# Altium PCB AS_Encoder.PcbDoc
Units mm, origin at the board's own origin, x right, y up, seen from the top; angles counter-clockwise.
Board outline 36 x 36 mm, 2 copper layers (Top Layer, Bottom Layer); 8 components, 10 nets, 42 pads, 29 vias.
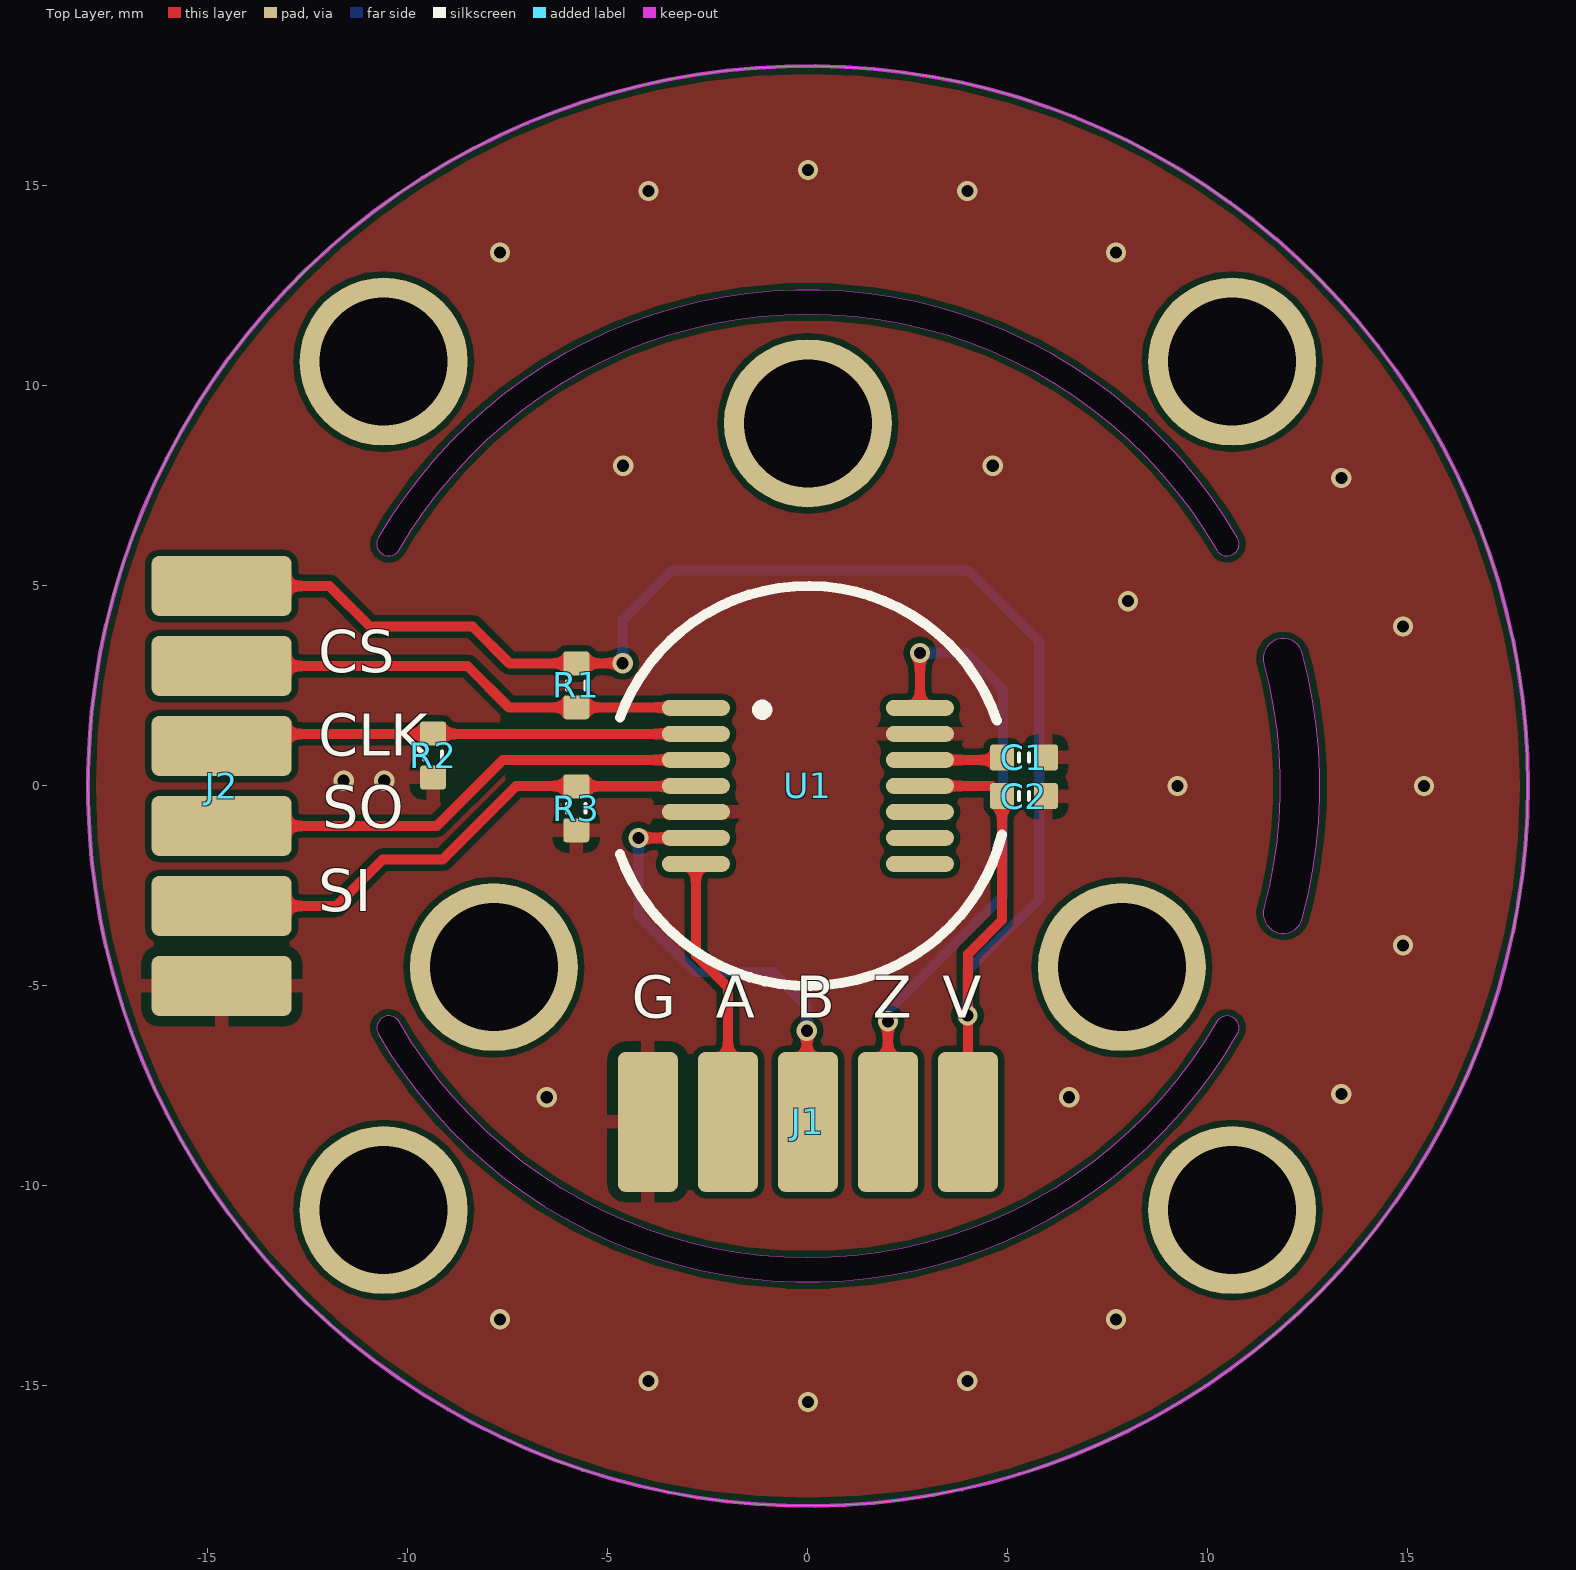
[diagram p0: Top Layer view]
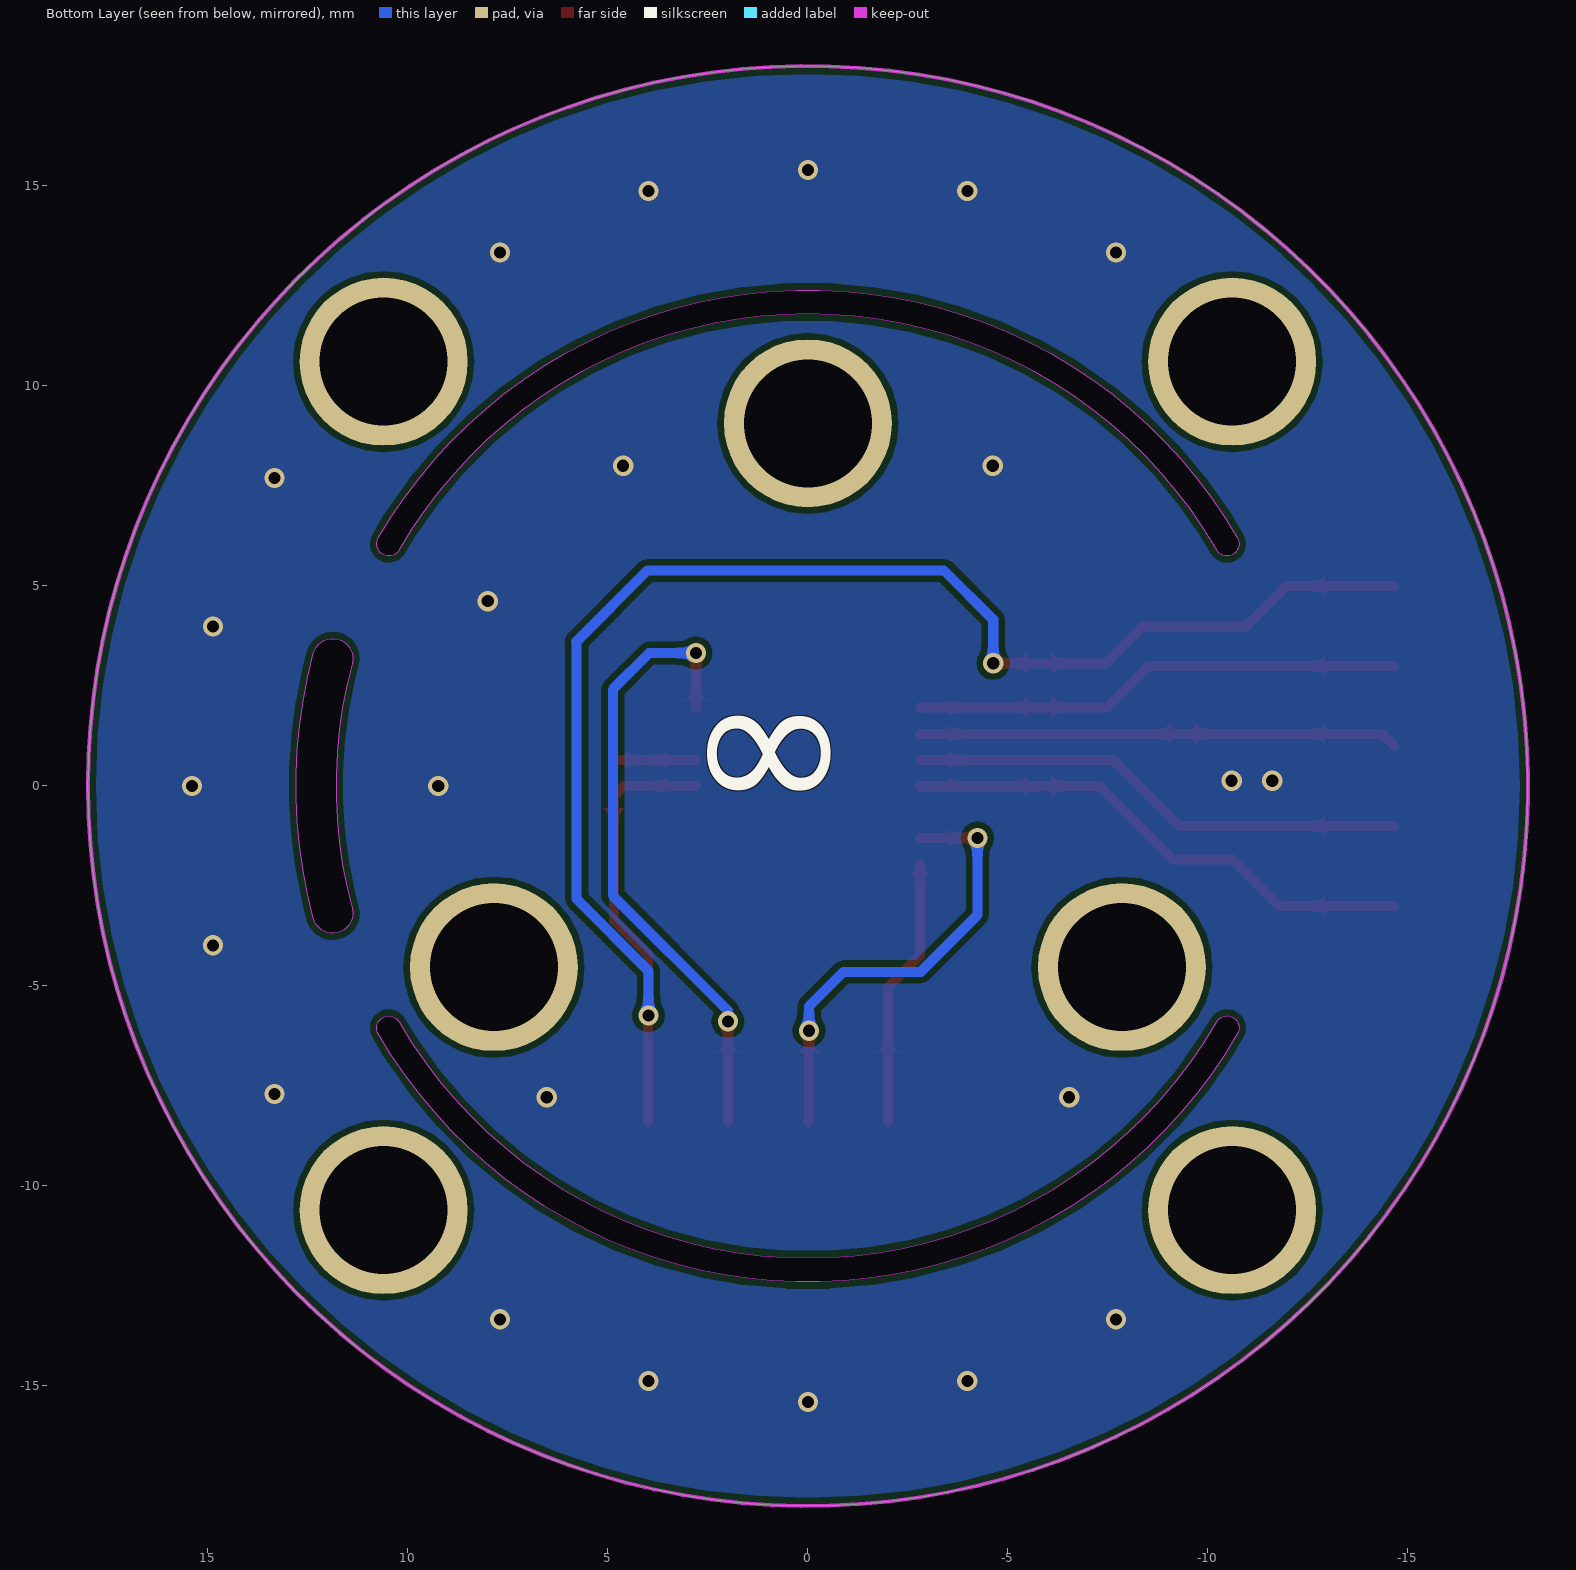
[diagram p1: Bottom Layer view, seen from below]
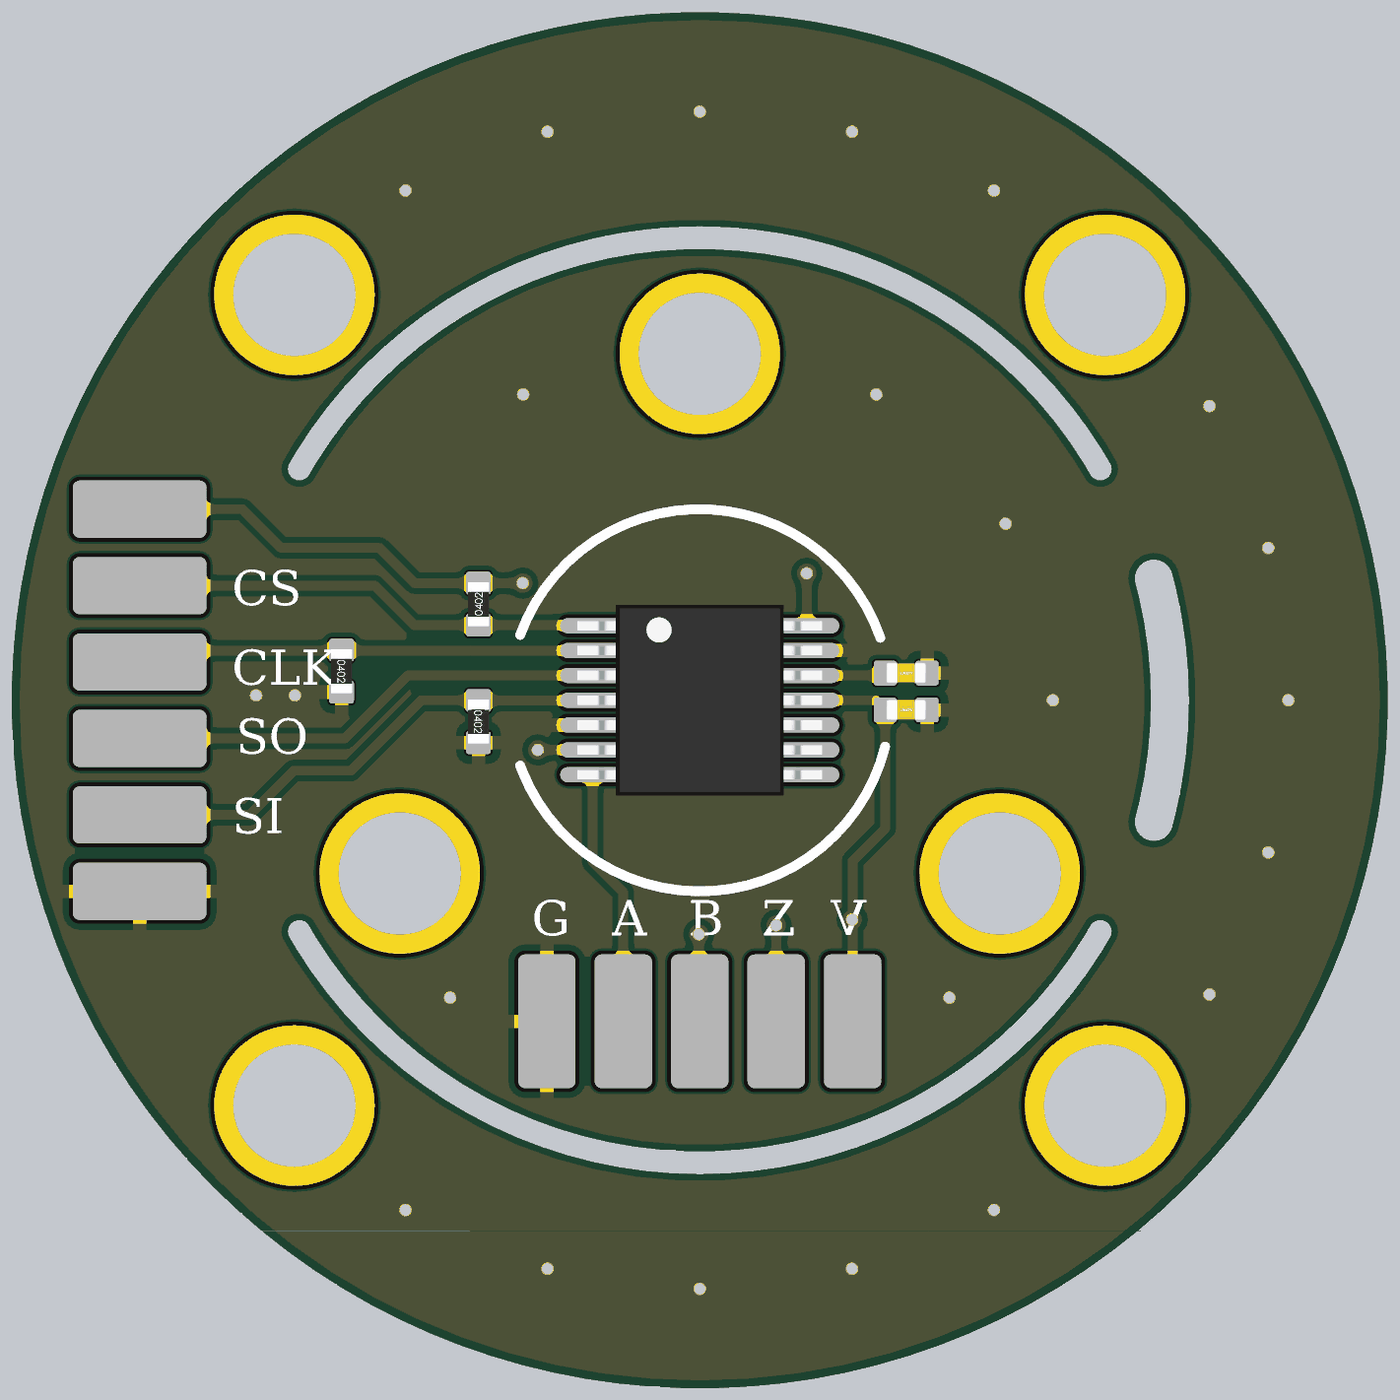
[diagram p2: 3D render of the assembled board from above, using the file's embedded part models]

## Layer stack, top to bottom
Top Solder: solder mask 0.0102, Solder Resist, Dk 3.5
Top Layer: signal copper 0.0356
Dielectric 1: dielectric 0.32, FR-4, Dk 4.8
Bottom Layer: signal copper 0.0356
Bottom Solder: solder mask 0.0102, Solder Resist, Dk 3.5

## Board outline
0,-18 cw(c0,0) -18,0 cw(c0,0) 0,18 cw(c0,0) 18,0 cw(c0,0)
cut-out: -10.738,-6.2 ccw(c0,0) 10.739,-6.2 ccw(c10.479,-6.05) 10.219,-5.9 cw(c0,0) -10.219,-5.9 ccw(c-10.479,-6.05)
cut-out: -10.739,6.2 ccw(c-10.479,6.05) -10.219,5.9 cw(c0,0) 10.219,5.9 ccw(c10.479,6.05) 10.739,6.2 ccw(c0,0)
cut-out: 11.398,-3.054 ccw(c11.881,-3.183) 12.364,-3.313 ccw(c0,0) 12.364,3.313 ccw(c11.881,3.184) 11.398,3.054 cw(c0,0)

## Design rules (kind name [scope] priority, off if disabled: settings)
Clearance [All] p1: gap=0.152 ignorepadtopadclearanceinfootprint=TRUE
PolygonConnect [All] p1: thpad.connectstyle=Direct thpad.reliefconductorwidth=0.254 thpad.reliefentries=4 thpad.polygonreliefangle="90 Angle" thpad.airgapwidth=0.254 smdpad.connectstyle=Relief smdpad.reliefconductorwidth=0.35 smdpad.reliefentries=4 smdpad.polygonreliefangle="90 Angle" smdpad.airgapwidth=0.254 via.connectstyle=Direct via.reliefconductorwidth=0.254 via.reliefentries=4 via.polygonreliefangle="90 Angle" via.airgapwidth=0.254
RoutingVias [All] p1: holewidth=0.711 width=1.27 viastyle="Through Hole" minholewidth=0.711 minwidth=1.27 maxholewidth=0.711 maxwidth=1.27
SolderMaskExpansion [All] p1: expansion=0.102
Width [All] p1: maxlimit=0.254 minlimit=0.254 preferedwidth=0.254
30 further rules are at their usual default settings.

## Components (designator, comment, footprint, x,y, rotation, side; value= is the part's Value field where it differs from the comment)
C1 "Container" 0402_C 5.401,0.711 r180 top value=1uF
C2 "Container" 0402_C 5.401,-0.254 r180 top value=100nF
J1 "connect5p" 2MMPIN 4,-8.4 r180 top
J2 "Connect" 2MMPIN6 -14.656,5 r270 top
R1 "R" 0402_R -5.791,2.515 r90 top
R2 "R" 0402_R -9.373,0.762 r270 top
R3 "R" 0402_R -5.791,-0.559 r270 top
U1 "AS" TSSOP-14 0,0 r0 top locked

## Footprints (in the part's own frame and the unit in brackets; to place one, negate y for a bottom-side part, rotate by r counter-clockwise, add the part's x,y. Pads: shape width x height; smd on the part's side, far side on the other; paste and mask are expansions set on the pad)
2MMPIN [mm]
  rrect25% 1.5x3.5 smd: 1(0,0) 2(2,0) 3(4,0) 4(6,0) 5(8,0)
2MMPIN6 [mm]
  rrect25% 1.5x3.5 smd: 1(0,0) 2(2,0) 3(4,0) 4(6,0) 5(8,0) 6(10,0)
0402_C [mm]
  rrect25% 0.6x0.65 smd mask+0.051: 1(-0.55,0) 2(0.55,0)
  silkscreen extent -0.13,-0.1 0.13,0.1, body extent -0.52,-0.28 0.52,0.27, height 0.53
0402_R [mm]
  rrect25% 0.6x0.65 smd mask+0.051: 1(-0.55,0) 2(0.55,0)
  silkscreen extent -0.1,-0.23 0.1,0.23, body extent -0.57,-0.27 0.58,0.28, height 0.4
TSSOP-14 [mm]
  oval 1.7x0.4 smd: 1(-2.8,1.95) 2(-2.8,1.3) 3(-2.8,0.65) 4(-2.8,0) 5(-2.8,-0.65) 6(-2.8,-1.3) 7(-2.8,-1.95) 8(2.8,-1.95) 9(2.8,-1.3) 10(2.8,-0.65) 11(2.8,0) 12(2.8,0.65) 13(2.8,1.3) 14(2.8,1.95)
  silkscreen extent -1.27,1.78 -1.02,2.03, body extent -3.2,-2.5 3.2,2.5, height 1.2

## Part data
C1 C2: library part C
J1: library part Connect_5p
J2: library part Connect_6p
U1: library part AS_5047P

## Free pads (board coordinates)
  round 4.2 hole 3.2: 4(0,9.064) 5(-7.85,-4.532) 6(7.85,-4.532) 10(-10.607,-10.607) 11(10.607,10.607) 12(10.607,-10.607) 13(-10.607,10.607)

## Via types
v1: diameter 0.508, hole 0.305, Top Layer to Bottom Layer, tented both sides, 29 vias

## Nets (pads, with @x,y where several pads share a name; then routed paths per layer and width w, separated by ;. In a path a pad name is that pad's centre, name@x,y a point inside that pad or via, vN(x,y) a via of type N, cw(c..) or ccw(c..) an arc to the next point about the centre after c; other vN are vias at no path point)
CLK: J2.3 R2.1 U1.2 | length 12
  Top Layer w0.254: J2.3 -14.356,1.3 U1.2
CS: J2.2 R1.1 U1.1 | length 12.3
  Top Layer w0.254: J2.2 -8.512,3 -7.476,1.965 R1.1 -2.815,1.965 U1.1
GND: C1.1 C2.1 J1.5 J2.6 R2.2 R3.2 U1.5 U1.13
  other v1: 0,-15.4 -3.986,-14.875 3.986,-14.875 -7.7,-13.337 7.7,-13.337 -6.531,-7.783 6.531,-7.783 13.337,-7.7 14.875,-3.986 9.24,0 15.4,0 -11.608,0.127 -10.592,0.127 14.875,3.986 8.002,4.62 13.337,7.7 -4.62,8.002 4.62,8.002 -7.7,13.337 7.7,13.337 -3.986,14.875 3.986,14.875 0,15.4
IFA: J1.4 U1.7 | length 6.8
  Top Layer w0.254: U1.7 -2.8,-4.236 -2,-5.036 J1.4
IFB: J1.3 U1.6 | length 11.4
  Top Layer w0.254: v1(-4.237,-1.3) U1.6 ; v1(-0.025,-6.121) -0.025,-8.375 J1.3
  Bottom Layer w0.254: v1(-4.237,-1.3) -4.237,-3.23 -2.819,-4.648 -0.889,-4.648 -0.025,-5.512 v1(-0.025,-6.121)
IFC: J1.2 U1.14 | length 15.8
  Top Layer w0.254: J1.2 v1(2,-5.886) ; U1.14 v1(2.8,3.321)
  Bottom Layer w0.254: v1(2,-5.886) 2,-5.62 4.877,-2.743 4.877,2.413 3.968,3.321 v1(2.8,3.321)
MISO: J2.4 U1.3 | length 12.5
  Top Layer w0.254: J2.4 -9.28,-1 -7.63,0.65 U1.3
MOSI: J2.5 R3.1 U1.4 | length 13.1
  Top Layer w0.254: J2.5 -11.788,-3 -10.63,-1.841 -9.131,-1.841 -7.29,0 -5.8,0 R3.1 -2.809,-0.009 U1.4
NetC1_2: C1.2 U1.12 | length 2.1
  Top Layer w0.254: U1.12 4.845,0.65 C1.2@4.851,0.644
VCC: C2.2 J1.1 J2.1 R1.2 U1.11 | length 44.3
  Top Layer w0.254: J2.1 -11.963,5 -10.949,3.986 -8.384,3.986 -7.463,3.065 R1.2 v1(-4.632,3.065) ; U1.11 4.597,0 C2.2 4.851,-3.353 4,-4.204 J1.1
  Bottom Layer w0.254: v1(-4.632,3.065) -4.632,4.157 -3.404,5.385 4.013,5.385 5.791,3.607 5.782,3.598 5.782,-2.828 3.988,-4.623 v1(3.988,-5.74)
pads on no net: U1.8 U1.9 U1.10

## Polygon pours and split planes (outlines as drawn)
GND on Bottom Layer "GND_L02_P009" (solid, remove dead copper, pour order 9): 0,-18 cw(c0,0) -18,0 cw(c0,0) 0,18 cw(c0,0) 18,0 cw(c0,0)
GND on Top Layer "GND_L01_P011" (solid, remove dead copper, pour order 11): 0,-18 cw(c0,0) -18,0 cw(c0,0) 0,18 cw(c0,0) 18,0 cw(c0,0)

## Keep-outs
Keep-Out Layer:
  circle w0.1: c0,0 r18

## Silkscreen, mask and mechanical layers (free items; w line width, h text height)
Top Overlay:
  lines w0.254: -4.698,-1.71 ccw(c0,0) 4.851,-1.213 ; -4.698,1.71 cw(c0,0) 4.725,1.635
  text "CS" at -12.243,2.489 h1.8
  text "CLK" at -12.243,0.406 h1.8
  text "SO" at -12.141,-1.397 h1.8
  text "SI" at -12.243,-3.48 h1.8
  text "G" at -4.4,-6.15 h1.8
  text "A" at -2.3,-6.15 h1.8
  text "B" at -0.3,-6.15 h1.8
  text "Z" at 1.626,-6.15 h1.8
  text "V" at 4.35,-6.15 h1.8
Bottom Overlay:
  text "∞" at 3.05,-2.6 h10
Mechanical 1:
  circle w0.1: c0,0 r18
  lines w0.1: -10.219,-5.9 ccw(c-10.479,-6.05) -10.738,-6.2 ccw(c0,0) 10.739,-6.2 ccw(c10.479,-6.05) 10.219,-5.9 cw(c0,0) -10.219,-5.9 ; -10.739,6.2 ccw(c-10.479,6.05) -10.219,5.9 cw(c0,0) 10.219,5.9 ccw(c10.479,6.05) 10.739,6.2 ccw(c0,0) -10.739,6.2 ; 11.398,-3.054 ccw(c0,0) 11.398,3.054 cw(c11.881,3.184) 12.364,3.313 cw(c0,0) 12.364,-3.313 cw(c11.881,-3.183) 11.398,-3.054